# Altium PCB InverterPCBV2.PcbDoc
Units mil, origin at the board's own origin, x right, y up, seen from the top; angles counter-clockwise.
Board outline 3937.01 x 3937.01 mil, 2 copper layers (Top Layer, Bottom Layer); 72 components, 46 nets, 219 pads, 16 vias.
Unrouted connection lines stored in the file: 1.
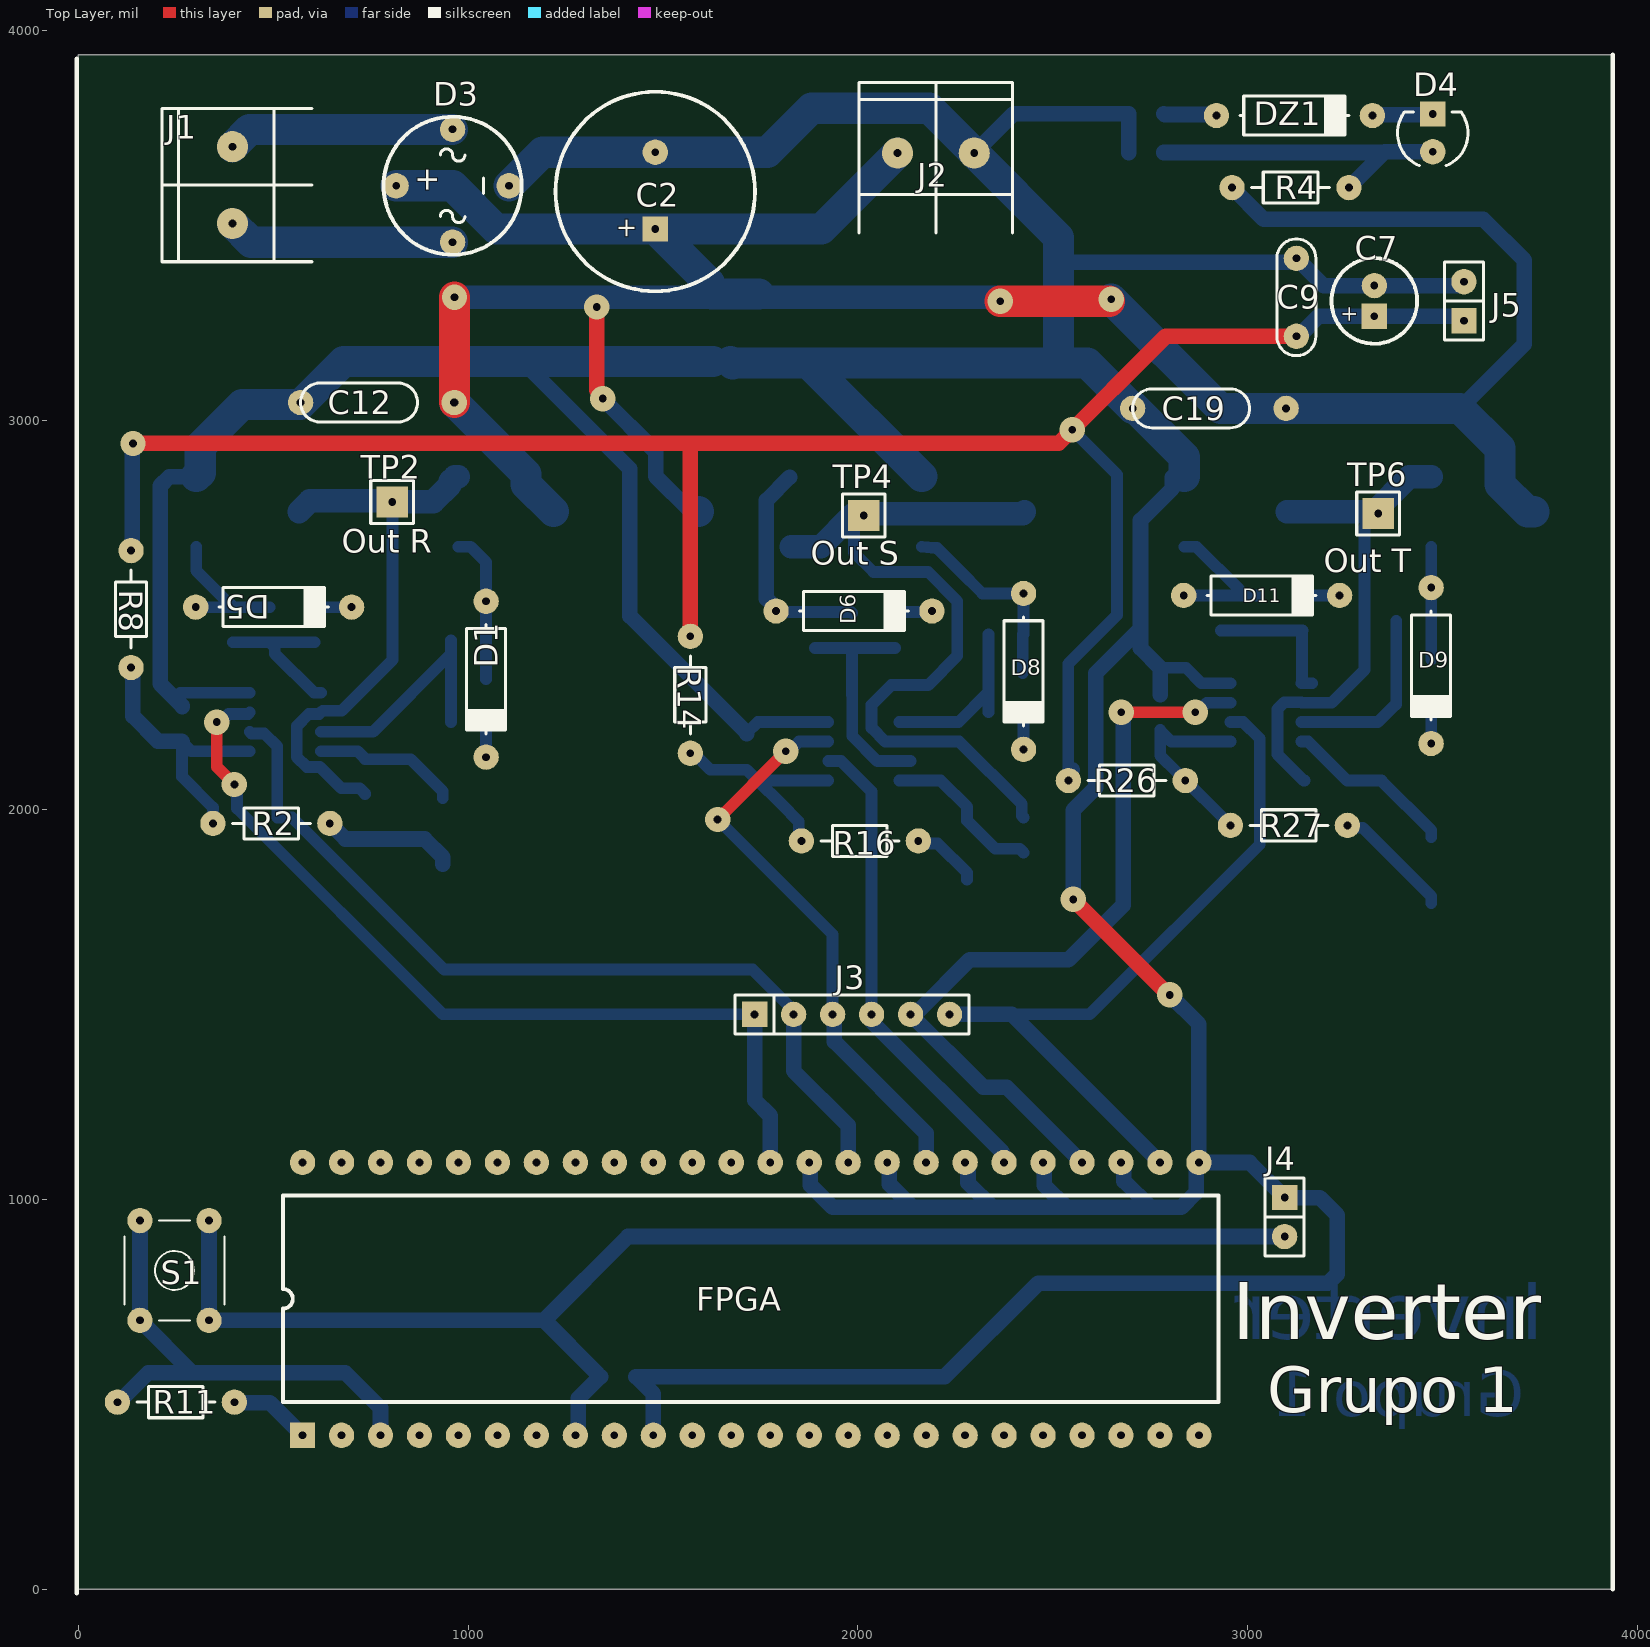
[diagram p0: Top Layer view]
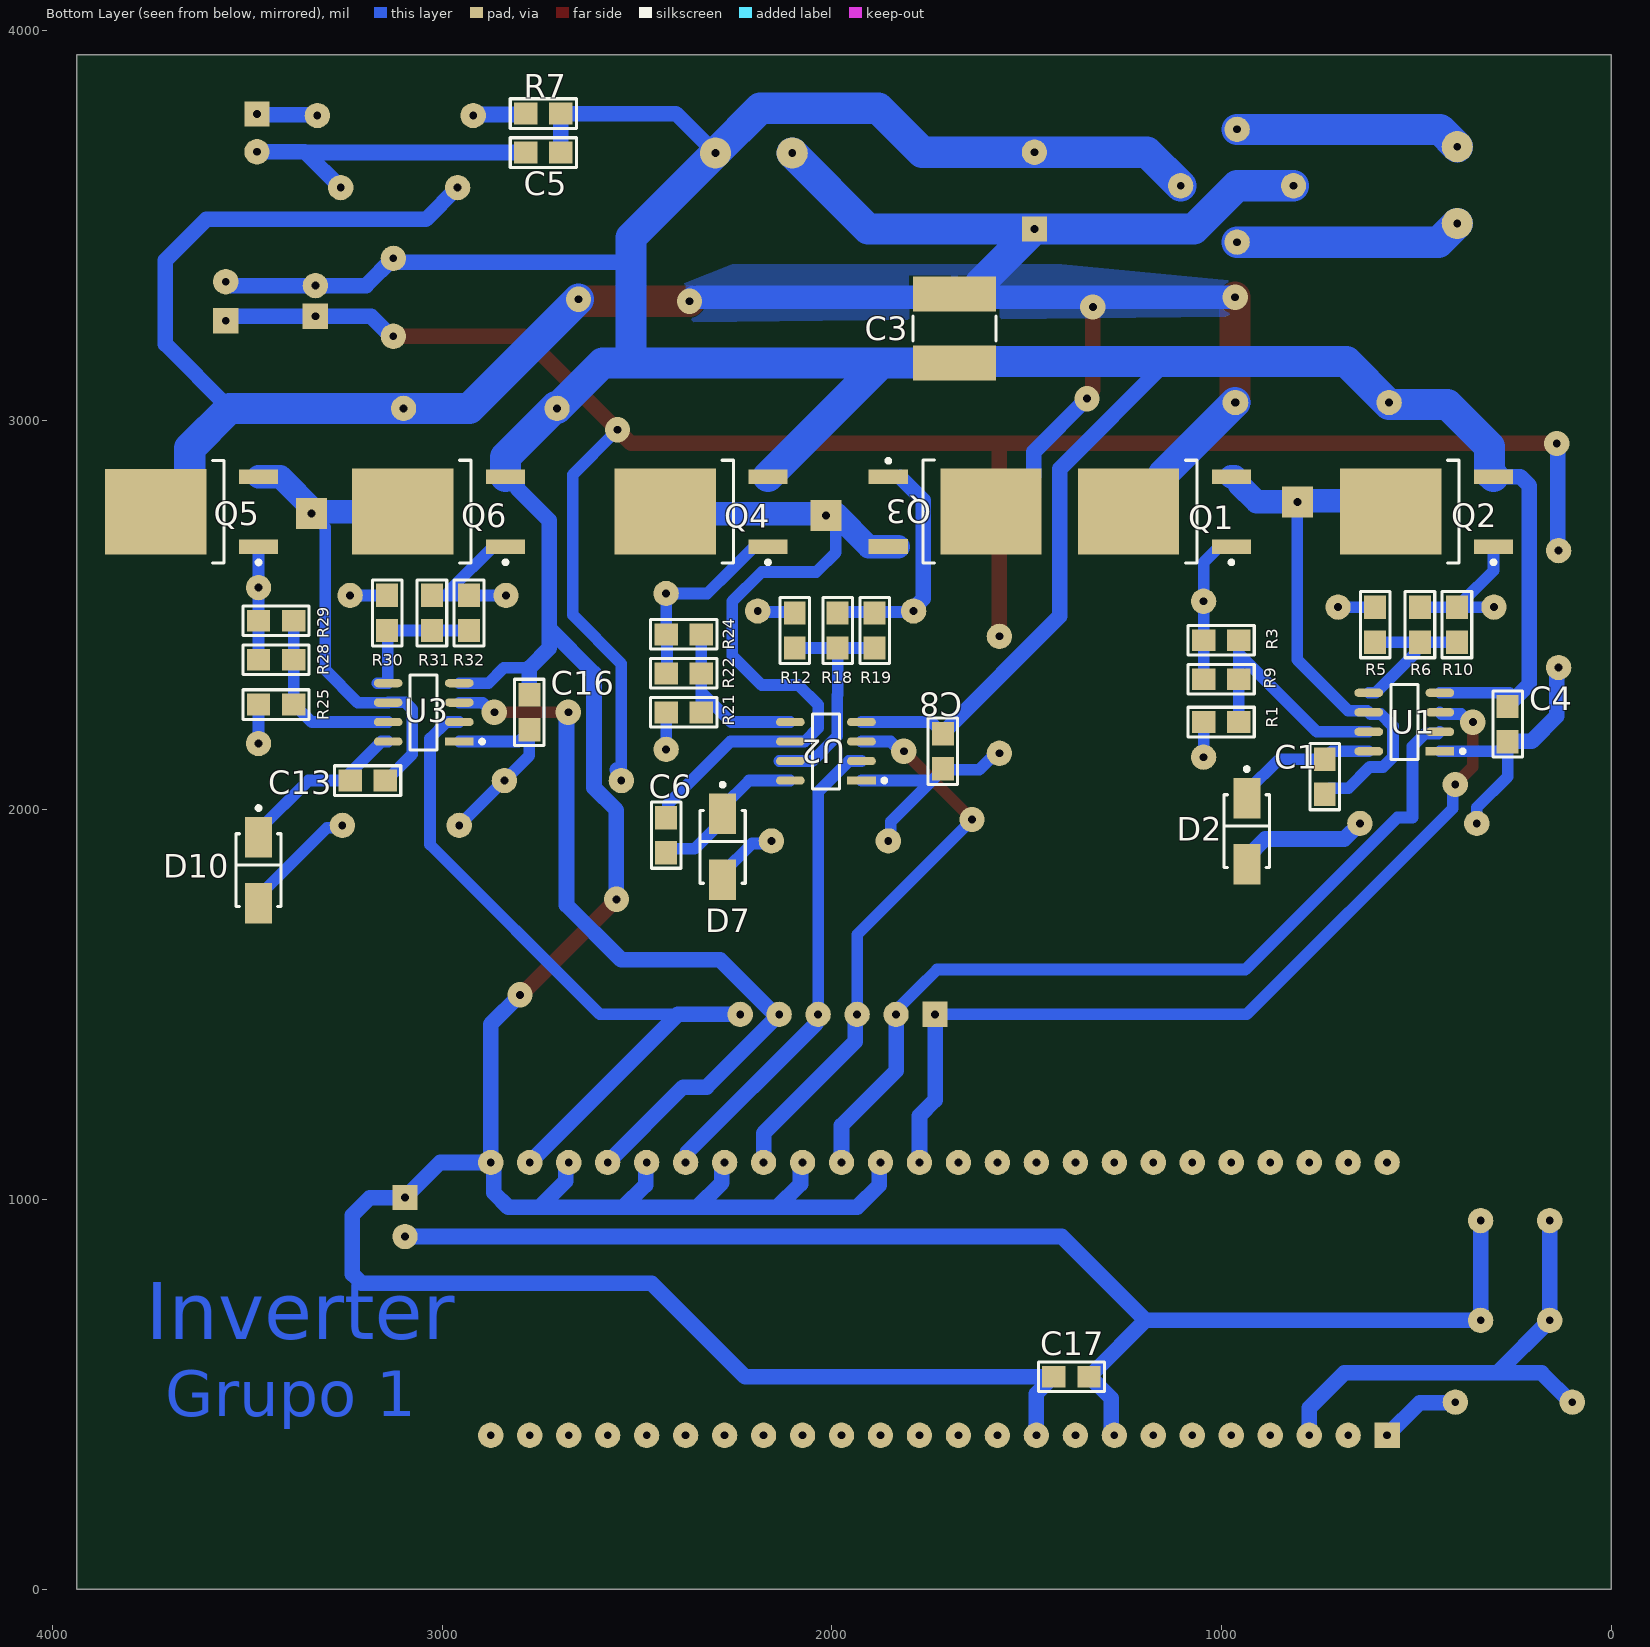
[diagram p1: Bottom Layer view, seen from below]

## Layer stack, top to bottom
Top Solder: solder mask 0.4, Solder Resist, Dk 3.5
Top Layer: signal copper 1.4
Dielectric 1: dielectric 12.6, FR-4, Dk 4.8
Bottom Layer: signal copper 1.4
Bottom Solder: solder mask 0.4, Solder Resist, Dk 3.5

## Board outline
0,0 3937.01,0 3937.01,3937.01 0,3937.01

## Design rules (kind name [scope] priority, off if disabled: settings)
Clearance [All] p1: gap=10 ignorepadtopadclearanceinfootprint=FALSE except(0: Arc-Hole Track-Hole SMDPad-Hole THPad-Hole Via-Hole Fill-Hole Poly-Hole Region-Hole Text-Hole; 15: Arc-Fill Arc-Poly Arc-Region Track-Fill Track-Poly Track-Region SMDPad-Fill SMDPad-Poly SMDPad-Region THPad-Fill THPad-Poly THPad-Region Via-Fill Via-Poly Via-Region)
PlaneClearance [All] p1: clearance=40
PolygonConnect [All] p1: connectstyle=Relief reliefconductorwidth=20 reliefentries=4 polygonreliefangle="90 Angle" airgapwidth=10
RoutingVias [All] p1: holewidth=20 width=65 viastyle="Through Hole" minholewidth=10 minwidth=50 maxholewidth=25 maxwidth=100
SilkToSilkClearance [All] p1: silktosilkclearance=0
SilkToSolderMaskClearance [IsPad] p1: minsilkscreentomaskgap=0 clearancetoexposedcopper=TRUE
SolderMaskExpansion [All] p1: expansion=4 istentingtop=FALSE
Width [All] p1: maxlimit=80 minlimit=30 preferedwidth=40 minimp=50.000000 maximp=50.000000 favimp=50.000000
27 further rules are at their usual default settings.

## Components (designator, comment, footprint, x,y, rotation, side; value= is the part's Value field where it differs from the comment)
C1 "1u" 0805 735,2085 r270 bottom
C2 "10u - 400V" CAP200RP2 1480,3586.4 r90 top
C3 "1uF - 500V" FP-GRM55D-0_4-IPC_B 1685,3235 r270 bottom
C4 "10u" 0805 265.91,2220 r90 bottom
C5 "100n" 0805 2740,3686.4 r0 bottom
C6 "1u" 0805 2425,1935 r90 bottom
C7 "10u - 25V" CAP100RP 3325,3305.63 r90 top
C8 "10u" 0805 1715,2150 r90 bottom
C9 "100n" CAP200#1 3125,3315 r90 top
C12 "100n - 400V" CAP200#2 720,3045 r180 top
C13 "1u" 0805 3190.91,2075 r180 bottom
C16 "10u" 0805 2775.91,2250 r90 bottom
C17 "470n" 0805 1385,545 r0 bottom
C19 "100n - 400V" CAP200#2 2855,3030 r180 top
D1 "1N4148" DO41 1045.91,2335 r270 top
D2 "ES1G" FP-403AE-MFG 935,1945 r270 bottom value=10pF
D3 "PUENTE" "PUENTE - W10M" 815.24,3601.16 r90 top
D4 "LED" LED3 3475,3736.4 r90 top
D5 "1N4148" DO41 500.91,2520 r0 top
D6 "1N4148" DO41 1990,2510 r0 top
D7 "ES1G" FP-403AE-MFG 2280,1905 r270 bottom value=10pF
D8 "1N4148" DO41 2425,2355 r270 top
D9 "1N4148" DO41 3470.91,2370 r270 top
D10 "ES1G" FP-403AE-MFG 3470.91,1845 r270 bottom value=10pF
D11 "1N4148" DO41 3035.91,2550 r0 top
DZ1 "13V" DO41 3120,3781.4 r0 top
FPGA "upduino" FPGA 575,395 r90 top
J1 "VAC" BORNERA2 395,3602.97 r0 top
J2 "AUX  310dc" BORNERA2 2200,3685 r270 top
J3 "CON6" SIP6 1735,1475 r0 top
J4 "Vin 5V" SIP2 3095,955 r270 top
J5 "Vin 5V" SIP2 3555,3305 r90 top
Q1 "IPD50R650CE" INF-PG-TO252-3-313_N 1145.91,2765 r0 bottom
Q2 "IPD50R650CE" INF-PG-TO252-3-313_N 473.39,2765 r0 bottom
Q3 "IPD50R650CE" INF-PG-TO252-3-313_N 1683.74,2765.24 r180 bottom
Q4 "IPD50R650CE" INF-PG-TO252-3-313_N 2335,2765 r0 bottom
Q5 "IPD50R650CE" INF-PG-TO252-3-313_N 3642.14,2764.76 r0 bottom
Q6 "IPD50R650CE" INF-PG-TO252-3-313_N 3008.36,2765 r0 bottom
R1 "33" 0805 1000.91,2225 r0 bottom
R2 "2.2" RES300 345,1965 r0 top
R3 "68" 0805 1000.91,2435 r0 bottom
R4 "100K - 2W" RES300 3260,3596.4 r180 top
R5 "33" 0805 605.91,2475 r90 bottom
R6 "68" 0805 490.91,2475 r90 bottom
R7 "1K" 0805 2740,3786.4 r180 bottom
R8 "10" RES300 135,2365 r90 top
R9 "68" 0805 1000.91,2335 r0 bottom
R10 "68" 0805 395.91,2475 r90 bottom
R11 "10K" RES300 100,480 r0 top
R12 "33" 0805 2095,2460 r90 bottom
R14 "10" RES300 1570,2145 r90 top
R16 "2.2" RES300 1855,1920 r0 top
R18 "68" 0805 1985,2460 r90 bottom
R19 "68" 0805 1890,2460 r90 bottom
R21 "33" 0805 2380,2250 r0 bottom
R22 "68" 0805 2380,2350 r0 bottom
R24 "68" 0805 2380,2450 r0 bottom
R25 "33" 0805 3425.91,2270 r0 bottom
R26 "10" RES300 2840,2075 r180 top
R27 "2.2" RES300 2955.91,1960 r0 top
R28 "68" 0805 3425.91,2385 r0 bottom
R29 "68" 0805 3425.91,2485 r0 bottom
R30 "33" 0805 3140.91,2505 r90 bottom
R31 "68" 0805 3025.91,2505 r90 bottom
R32 "68" 0805 2930.91,2505 r90 bottom
S1 "TACT SWITCH" TACTSWITCH 246.42,817.95 r180 top
TP2 "Out R" TPTH 805,2790 r90 top
TP4 "Out S" TPTH 2015,2755 r0 top
TP6 "Out T" TPTH 3335,2760 r90 top
U1 "UCC27710" FP-PG-DSO-8-IPC_C 530.91,2225 r0 bottom
U2 "UCC27710" FP-PG-DSO-8-IPC_C 2015,2150 r0 bottom
U3 "UCC27710" FP-PG-DSO-8-IPC_C 3047.09,2250 r0 bottom

## Footprints (in the part's own frame and the unit in brackets; to place one, negate y for a bottom-side part, rotate by r counter-clockwise, add the part's x,y. Pads: shape width x height; smd on the part's side, far side on the other; paste and mask are expansions set on the pad)
0805 [mil] "Pasivo 0805"
  rect 60x56 smd: 1(-45,0) 2(45,0)
  silkscreen extent -85,-38 85,38, body extent -40,-25 39,25, height 15
BORNERA2 [mil] "Bornera con Tornillos 5mm separación"
  round 80 hole 20: 1(0,98.43) 2(0,-98.43)
  silkscreen extent -181,-197 205,197, body extent -148,-193 155,221, height 394
CAP100RP [mil] "Body diameter 5mm"
  rect 65x65 hole 20: 1(-39.37,0)
  round 65 hole 20: 2(39.37,0)
  silkscreen extent -110,-110 110,110, body extent -99,-99 99,100, height 454
CAP200#1 [mil]
  round 65 hole 20: 1(-100,0) 2(100,0)
  silkscreen extent -150,-50 150,50, body extent -110,-46 110,44, height 246
CAP200#2 [mil]
  round 65 hole 20: 1(-243.7,0) 2(150,0)
  silkscreen extent -150,-50 150,50, body extent -110,-46 110,44, height 246
CAP200RP2 [mil] "Body Diameter 12.5mm"
  rect 65x65 hole 20: 1(-96.06,0)
  round 65 hole 20: 2(100.79,0)
  silkscreen extent -256,-256 256,256, body extent -246,-245 244,246, height 787
DO41 [mil]
  round 65 hole 20: 1(-200,0) 2(200,0)
  silkscreen extent -140,-50 140,50, body extent -215,-47 215,54, height 80
FP-403AE-MFG [mm]
  rect 2.65x1.75 smd paste+0 mask+0: 1(-2.15,0) 2(2.15,0)
  silkscreen extent -4.17,-1.48 2.37,1.48, body extent -2.6,-1.36 2.6,1.36, height 2.5
FP-GRM55D-0_4-IPC_B [mil]
  rect 90.64x212.72 smd paste+0 mask+0: 1(-88.6,0) 2(88.6,0)
  silkscreen extent -31,-106 31,106, body extent -112,-98 112,98, height 79
FP-PG-DSO-8-IPC_C [mil]
  rect 73.78x21.34 smd paste+0 mask+0: 1(-91.18,75)
  rrect100% 73.78x21.34 smd paste+0 mask+0: 2(-91.18,25) 3(-91.18,-25) 4(-91.18,-75) 5(91.18,-75) 6(91.18,-25) 7(91.18,25) 8(91.18,75)
  silkscreen extent -155,-96 35,96, body extent -118,-96 118,96, height 69
FPGA [mil]
  rect 65x65 hole 20: 1(0,0)
  round 65 hole 20: 2(0,-100) 3(0,-200) 4(0,-300) 5(0,-400) 6(0,-500) 7(0,-600) 8(0,-700) 9(0,-800) 10(0,-900) 11(0,-1000) 12(0,-1100) 13(0,-1200) 14(0,-1300) 15(0,-1400) 16(0,-1500) 17(0,-1600) 18(0,-1700) 19(0,-1800) 20(0,-1900) 21(0,-2000) 22(0,-2100) 23(0,-2200) 24(0,-2300) 25(700,-2300) 26(700,-2200) 27(700,-2100) 28(700,-2000) 29(700,-1900) 30(700,-1800) 31(700,-1700) 32(700,-1600) 33(700,-1500) 34(700,-1400) 35(700,-1300) 36(700,-1200) 37(700,-1100) 38(700,-1000) 39(700,-900) 40(700,-800) 41(700,-700) 42(700,-600) 43(700,-500) 44(700,-400) 45(700,-300) 46(700,-200) 47(700,-100) 48(700,0)
  silkscreen extent 85,-2350 615,50
INF-PG-TO252-3-313_N [mm] "DPAK, 3-Leads, Body 6.5x6.12mm, Pitch 2.28mm, IPC Medium Density"
  rect 2.55x0.95 smd: 1(-4.35,2.28) 3(-4.35,-2.28)
  rect 6.6x5.6 smd: 2(2.35,0)
  silkscreen extent -4.47,-3.35 -1.35,3.43, body extent -2.1,-3.32 4.12,3.32, height 2.35
LED3 [mil]
  round 65 hole 20: 1(-48,0)
  rect 65x65 hole 20: 2(49,0)
  silkscreen extent -84,-90 54,90, body extent -65,-64 65,65, height 19
"PUENTE - W10M" [mil]
  round 65 hole 20: 1(0,0) 2(-144.76,-144.76) 3(0,-289.52) 4(144.76,-144.76)
  silkscreen extent -177,-322 177,32
RES300 [mil]
  round 65 hole 20: 1(0,0) 2(300,0)
  silkscreen extent 50,-40 250,40, body extent -10,-38 310,38, height 79
SIP2 [mil]
  rect 65x65 hole 20: 1(-50,0)
  round 65 hole 20: 2(50,0)
  silkscreen extent -100,-50 100,50
SIP6 [mil]
  rect 65x65 hole 20: 1(0,0)
  round 65 hole 20: 2(100,0) 3(200,0) 4(300,0) 5(400,0) 6(500,0)
  silkscreen extent -50,-50 550,50, body extent -50,-51 550,49, height 330
TACTSWITCH [mil]
  round 65 hole 20: 1(-88.58,-127.95) 2(-88.58,127.95) 3(88.58,-127.95) 4(88.58,127.95)
  silkscreen extent -128,-128 128,128, body extent -120,-156 124,156, height 276
TPTH [mil]
  rect 80x80 hole 20: 1(0,0)
  silkscreen extent -55,-55 55,55, body extent -50,-50 50,50, height 238

## Part data
C1 C4 C5 C6 C8 C9 C12 C13 C16 C17 C19: library part CAP
C2 C7: library part CAPPOL
C3: library part CMP-2000-06370-2, "Chip Multilayer Ceramic Capacitors for General Purpose, 2220, 1.0uF, X7R, 15%, 10%, 500V", Capacitance=1uF, Case Code (Imperial)=2220, Case Code (Metric)=5750, Dielectric=X7R, Max Operating Temperature=125°C, Min Operating Temperature=-55°C, Package Quantity=1, Tolerance=10%, Voltage=250V, Case/Package=2220, Depth=5mm, Height=2mm, Lead Free="Lead Free", Length=5.7mm, Material=Ceramic, Mount="Surface Mount", Number of Pins=2, Packaging="Tape and Reel", REACH SVHC="No SVHC", Termination=SMD/SMT, Thickness=0.087inch, Voltage Rating=250V, Voltage Rating (DC)=250V, Width=5mm
D1 D5 D6 D8 D9 D11: library part DIODO
D2 D7 D10: library part CMP-07163-000025-1, "DIODE GEN PURP 400V 1A SMA", Capacitance=10pF, Forward Current=1A, Manufacturer="ON Semiconductor", Max Junction Temp=+150°C, Max Repetitive Reverse Voltage=400V, Max Surge Forward Current=30A, Package=403AE, Peak Reverse Current=5uA, Temperature="to +150°C", Automotive=No, Category=Diode, ComponentLink2Description=Datasheet, ComponentLink2URL=https://www.onsemi.com/pub/Collateral/ES1J-D.PDF, Device Class L1="Discrete Semiconductors", Device Class L2=Diodes, Device Class L3="Rectifier Diodes", Digikey Description="DIODE GEN PURP 400V 1A SMA", Footprint Url=https://www.onsemi.com/pub/Collateral/403AE.PDF, Height=2.5mm, Lead Free=Yes, Manufacturer Part Number=ES1G, Mouser Description="Rectifiers 1.0 A Ultra Fast Recovery Rect", Octopart=https://octopart.com/es1g-on+semiconductor-84324858, RoHS=TRUE, Standoff Height=0.05mm, Temperature Range High=+150°C
DZ1: library part "DIODO ZENER"
FPGA: library part FPGA, "upduino v3.0"
J1 J2: library part "BORNERA 2"
J4 J5: library part CON2, "UPDuino Power Input"
Q1 Q2 Q3 Q4 Q5 Q6: library part CMP-1164-00335-1, "N-Channel CoolMOS CE Power-Transistor, 500 V VDS, 6.1 A ID, -55 to 150 degC, PG-TO252-3-313, Reel, Green", Manufacturer=Infineon, ComponentLink1Description="Manufacturer URL", ComponentLink1URL=http://www.infineon.com/, ComponentLink2Description=Datasheet, ComponentLink2URL=http://www.infineon.com/dgdl/IPD50R650CE+2.0.pdf?folderId=db3a3043156fd5730115c736bcc70ff2&fileId=db3a304339d29c450139d41341a202a1, ComponentLink3Description="Package Specification", ComponentLink3URL=http://www.infineon.com/dgdl/PG-TO252-3-313-Package_Overview.pdf?folderId=db3a30432b57a660012b81890ade72d2&fileId=db3a30432b57a660012b8193af2872eb, DatasheetVersion="Rev. 2.0", Green=TRUE, ID (max)="6.1Â A", IDpuls (max)="19Â A", Mounting Technology="Surface Mount", PackageDescription="3-Pin Plastic (Green) Transistor Single Outline Package, 6.5 x 6.12 mm Body, 2.28 mm Pitch", PackageReference=PG-TO252-3-313, PackageVersion=Oct-10, Packing=Reel, PartNumber=IPD50R650CE, Polarity=N, Ptot (max)="47Â W", QG="15Â nC", RDS (on) (max)="650Â mOhm", Rth="2.67Â K/W", RthJA (max)="62Â K/W", RthJC (max)="2.67Â K/W", Technology="CoolMOS CE", VDS (max)="500Â V", VGS(th) (max)="3.5Â V", VGS(th) (min)="2.5Â V"
R1 R12 R25: library part RES, "33?"
R2 R3 R4 R5 R6 R7 R8 R9 R10 R11 R14 R16 R18 R19 R21 R22 R24 R26 R27 R28 R29 R30 R31 R32: library part RES
TP2 TP4 TP6: library part TP
U1 U2 U3: library part CMP-32851-000209-1, "GATE DRVR HI/LOW SIDE 8SOIC", Case/Package=SOIC, Max Operating Temperature=150°C, Max Output Current=600mA, Max Supply Voltage=20V, Min Operating Temperature=-40°C, Min Supply Voltage=10V, Output Voltage=620V, Package Quantity=95, Channel Type=Independent, Fall Time=90ns, Halogen Free="Halogen Free", Height=0.059inch, Lead Free="Lead Free", Length=0.196inch, Mount="Surface Mount", Number of Channels=2, Number of Drivers=2, Number of Outputs=2, Number of Pins=8, Output Current=600mA, Packaging=Rail/Tube, Propagation Delay=160ns, Reach SVHC Compliant=Yes, RoHS Compliant=Yes, Series=-, Width=0.157inch

## Via types
v1: diameter 65, hole 20, Top Layer to Bottom Layer, 16 vias

## Nets (pads, with @x,y where several pads share a name; then routed paths per layer and width w, separated by ;. In a path a pad name is that pad's centre, name@x,y a point inside that pad or via, vN(x,y) a via of type N, cw(c..) or ccw(c..) an arc to the next point about the centre after c; other vN are vias at no path point)
5V: C17.1 FPGA.8 J4.2 S1.1 S1.2 | length 3487.3
  Bottom Layer w40: S1.1 S1.2 1195,690 ; FPGA.8 1282.41,402.41 1282.41,489.41 C17.1@1338,545 ; C17.1 C17.1@1338,545 ; J4.2 1410,905 1195,690 ; 1195,690 1330,555 1330,553 C17.1@1338,545
GND: C2.2 C3.2 C4.2 C5.1 C7.2 C8.2 C9.2 C12.2 C16.2 C17.2 C19.2 D3.3 FPGA.1 FPGA.10 FPGA.25 FPGA.27 FPGA.29 FPGA.31 FPGA.33 FPGA.35 J2.1 J4.1 J5.2 Q2.3 Q4.3 Q6.3 R7.2 R11.2 U1.4 U2.4 U3.4 | length 16087.3
  Top Layer w40: v1(2552.5,1770) 2797.5,1525 v1(2800,1525)
  Bottom Layer w30: 260.91,2300 U1.4 ; C8.2@1715,2197 1743,2225 U2.4 ; 2775.91,2364.09 2841.81,2364.09 2880.91,2325 U3.4
  Bottom Layer w40: C4.2 265.91,2267 210,2322.91 210,2831.33 233.43,2854.76 Q2.3 ; R11.2 401,479 491,479 FPGA.1 ; 1139.45,3150 1415,2874.45 1415,2497 1715,2197 C8.2 ; C17.2 C17.2@1432,545 ; FPGA.10 1475,502 C17.2@1432,545 ; C3.2@1627.56,3150 C3.2@1672.8,3150 ; FPGA.35 1877.77,1092.23 1877.77,1037.23 1935,980 2140,980 ; FPGA.33 2080.27,1089.73 2080.27,1039.73 2140,980 ; FPGA.31 2282.41,1087.59 2282.41,1042.59 2345,980 ; J2.1 2399.82,3786.4 R7.2 ; FPGA.29 2477.77,1092.23 2477.77,1037.23 2535,980 ; 2515,3405 C9.2@3125,3405 ; v1(2552.5,1770) 2552.5,1999.11 2610,2056.61 2610,2349.93 2725,2464.93 ; FPGA.27 2682.41,1087.59 2682.41,1047.59 2750,980 ; C5.1 R7.2@2695,3781.4 ; C16.2 2775.91,2364.09 2725,2415 2725,2464.93 ; v1(2800,1525) 2875,1450 FPGA.25@2875,1112.9 ; Q6.3 2808.2,2854.76 2806.9,2853.46 2806.9,2824.57 2725,2742.66 2725,2464.93 ; C9.2 3195,3345 C7.2 3539.84,3345 3549.84,3355 J5.2 ; C17.2@1432,545 2222.5,545 2462.5,785 3206.57,785 3230,808.43 3230,960 3185,1005 J4.1 3005,1095 FPGA.25 2867.59,1087.59 2867.59,1017.59 2830,980 2750,980 ; 2140,980 2345,980 ; 2345,980 2535,980 ; 2535,980 2750,980
  Bottom Layer w80: Q2.3 312.32,2864.96 312.32,2932.32 420,3040 570,3040 680,3150 1139.45,3150 C3.2@1627.56,3150 ; D3.3 1190.79,3687.19 C2.2 1767.72,3687.19 1880.53,3800 2183.43,3800 J2.1 2515,3468.43 2515,3405 2515,3146.4 ; C3.2@1672.8,3150 C3.2@1678.97,3143.83 ; C3.2 1872.1,3146.4 ; Q4.3 1872.1,3146.4 ; C19.2 2588.6,3146.4 2515,3146.4 ; C19.2@2707.34,3035 2837.1,2905.24 Q6.3 ; 1872.1,3146.4 2515,3146.4
HI-1: FPGA.34 J3.2 U1.2 | length 2246.4
  Bottom Layer w30: U1.2 444.05,2195.67 476.97,2195.67 510,2162.64 510,1980 548.68,1980 938.68,1590 1730,1590 1779.15,1540.85 1817.5,1502.5 1817.5,1501.97 1835,1484.47 J3.2
  Bottom Layer w40: J3.2 1835,1330 1975,1190 FPGA.34
HI-2: FPGA.30 J3.4 U2.2 | length 1236.2
  Bottom Layer w30: U2.2 1956.73,2125 2035,2046.73 J3.4
  Bottom Layer w40: J3.4 2039.78,1470.22 2039.78,1451.97 2370.22,1121.54 2370.22,1099.78 FPGA.30
HI-3: FPGA.26 J3.6 U3.2 | length 1878.3
  Bottom Layer w30: 2395,1475 2595,1475 3030.91,1910.91 3030.91,2182.92 2988.82,2225 U3.2
  Bottom Layer w40: J3.6 2395,1475 FPGA.26
LI-1: FPGA.36 J3.1 U1.3 | length 2281.9
  Top Layer w30: v1(355,2225) 355,2110 v1(400,2065)
  Bottom Layer w30: v1(355,2225) 364.47,2225 385.14,2245.67 435.39,2245.67 U1.3 ; v1(400,2065) 406.7,2058.3 406.7,2003.3 935,1475 J3.1
  Bottom Layer w40: J3.1 1735,1255 1775,1215 FPGA.36
LI-2: FPGA.32 J3.3 U2.3 | length 1468.3
  Top Layer w30: v1(1640,1975) v1(1815,2150)
  Bottom Layer w30: v1(1640,1975) 1935,1680 J3.3 ; v1(1815,2150) 1823.74,2150 1848.74,2175 U2.3
  Bottom Layer w40: J3.3 1939.78,1470.22 1939.78,1405.22 2175,1170 FPGA.32
LI-3: FPGA.28 J3.5 U3.3 | length 2016.7
  Top Layer w30: v1(2675.91,2250) v1(2865.64,2250)
  Bottom Layer w30: v1(2865.64,2250) 2870.38,2250 2895.38,2275 U3.3
  Bottom Layer w40: J3.5 2321.54,1288.46 2381.54,1288.46 FPGA.28 ; J3.5@2159.11,1487.5 2286.61,1615 2540,1615 2680.69,1755.69 2680.69,2245.22 v1(2675.91,2250)
NetC1_1: C1.1 D2.1 U1.8 | length 374.3
  Bottom Layer w30: U1.8 717,2150 735,2132 C1.1 852.36,2130 935,2047.36 D2.1
NetC1_2: C1.2 Q1.3 Q2.2 TP2.1 U1.6 | length 1464.9
  Bottom Layer w30: C1.2 735,2042 722,2055 674.21,2055 619.21,2110 585.42,2110 560.2,2135.22 560.2,2214.78 591.09,2245.67 617.76,2245.67 U1.6 626.42,2254.33 675.23,2254.33 805.91,2385 TP2.1@805.91,2790
  Bottom Layer w60: Q2.2 593.41,2792.5 TP2.1@802.5,2792.5 ; TP2.1@805.91,2790 909.88,2790 954.45,2834.57 954.45,2843.46 965.75,2854.76 Q1.3
NetC4_1: C4.1 R2.1 R8.1 U1.1 | length 704
  Bottom Layer w30: R2.1 345,2005.91 265.91,2085 265.91,2173 288.91,2150 U1.1
  Bottom Layer w40: R8.1 139.78,2360.22 139.78,2240.22 204.03,2175.97 264.93,2175.97 C4.1
NetC5_2: C5.2 D4.1 R4.1 | length 818.1
  Bottom Layer w40: C5.2 3350,3686.4 ; R4.1 3350,3686.4 ; D4.1 3352,3688.4 3350,3686.4
NetC6_1: C6.1 D7.1 U2.8 | length 416.2
  Bottom Layer w30: U2.8 2212.36,2075 2280,2007.36 D7.1 2280,1971.93 2352,1899.93 2415.07,1899.93 C6.1
NetC6_2: C6.2 Q3.3 Q4.2 TP4.1 U2.6 | length 2018.3
  Bottom Layer w30: TP4.1@1990,2755 1990,2660 2040,2610 2180,2610 2255,2535 2255,2395 2180,2320 2085.48,2320 2035,2269.52 2035,2210 2070,2175 U2.6 2260,2175 2420,2015 2420,1985 C6.2
  Bottom Layer w60: Q3.3@1829.09,2675 1905,2675 TP4.1@1987.5,2757.5 ; TP4.1@1990,2760 2422.52,2760 Q4.2
NetC7_1: C7.1 C9.1 J5.1 R8.2 R14.2 R26.2 | length 5335.4
  Top Layer w40: v1(140,2940) 1575,2940 ; R14.2 1570,2935 1575,2940 ; C9.1 2790,3215 2515,2940 1575,2940
  Bottom Layer w30: R26.2 2540,2375 2665,2500 2665,2860 v1@2555,2970
  Bottom Layer w40: R8.2 137.5,2667.5 137.5,2937.5 v1(140,2940) ; R26.2 R26.2@2544.78,2079.78 ; R26.2@2544.78,2097.46 R26.2@2550,2102.68 ; C9.1 3130.95,3215 3182.21,3266.26 C7.1 3543.74,3266.26 J5.1
  other v1: 2550,2975
NetC8_1: C8.1 R14.1 R16.1 U2.1 | length 584.2
  Bottom Layer w30: R14.1 1579.47,2145 1621.47,2103 1715,2103 1743,2075 ; R16.1 1848.3,1926.7 1848.3,1969.7 1803,2015 1743,2075 ; U2.1 1743,2075
NetC13_1: C13.1 D10.1 U3.8 | length 444.6
  Bottom Layer w30: U3.8 3155.84,2175 3255.84,2075 3343.27,2075 3470.91,1947.36 D10.1
NetC13_2: C13.2 Q5.3 Q6.2 TP6.1 U3.6 | length 1321.3
  Bottom Layer w30: Q6.2 Q6.2@3120.56,2765 ; C13.2 3143.91,2075 3076.38,2142.52 3076.38,2257.96 3093.95,2275.54 3137.74,2275.54 U3.6 3215.91,2275 3300,2359.09 3300,2725 TP6.1
  Bottom Layer w60: Q6.2@3100.95,2765.07 3325.07,2765.07 3415,2855 3470.41,2855 Q5.3
NetC16_1: C16.1 R26.1 R27.1 U3.1 | length 511.7
  Bottom Layer w30: C16.1@2775.91,2203 2803.91,2175 U3.1 ; C16.1 2775.91,2139.09 2820,2095 2820.91,2095 R27.1
NetD1_1: D1.1 Q1.1 R3.2 R9.2 | length 388.2
  Bottom Layer w30: Q1.1 1006.14,2675.24 1045.91,2635.47 D1.1 R3.2 R9.2
NetD1_2: D1.2 R1.2 | length 90
  Bottom Layer w30: D1.2 R1.2
NetD2_2: D2.2 R2.2 | length 343.7
  Bottom Layer w40: R2.2 685,1925 888.07,1925 935,1878.07 D2.2
NetD3_2: D3.2 J1.2 | length 584.9
  Bottom Layer w80: J1.2 443.15,3456.4 D3.2
NetD3_4: D3.4 J1.1 | length 584.8
  Bottom Layer w60: J1.1 J1.1@396.35,3701.4
  Bottom Layer w80: J1.1 439.52,3745.92 D3.4
NetD4_2: D4.2 DZ1.2 | length 156.7
  Bottom Layer w40: DZ1.2 3322,3783.4 3473,3783.4 D4.2
NetD5_1: D5.1 Q2.1 R6.2 R10.2 | length 385.3
  Bottom Layer w30: D5.1 R10.2 ; Q2.1 302.13,2613.78 380.91,2535 382.91,2535 395.91,2522 R10.2 ; R6.2 R10.2
NetD5_2: D5.2 R5.2 | length 95
  Bottom Layer w30: R5.2 D5.2
NetD6_1: D6.1 Q3.1 R18.2 R19.2 | length 575.9
  Bottom Layer w30: D6.1 1792.5,2507.5 1890,2507.5 1982.5,2507.5 R18.2
  Bottom Layer w40: D6.1 1790,2516.76 1765,2541.76 1765,2793.9 Q3.1@1824.8,2853.7
NetD6_2: D6.2 R12.2 | length 97.1
  Bottom Layer w30: R12.2 2097.5,2507.5 2187.5,2507.5 D6.2
NetD7_2: D7.2 R16.2 | length 176.7
  Bottom Layer w30: R16.2 2161.7,1913.3 2204.77,1913.3 2280,1838.07 D7.2
NetD8_1: D8.1 Q4.1 R22.2 R24.2 | length 514.7
  Bottom Layer w30: Q4.1 2198.94,2671.54 2203.15,2671.54 2258.47,2616.22 2319.68,2555 D8.1 R24.2 ; R22.2@2423,2350 R24.2@2423,2450
NetD8_2: D8.2 R21.2 | length 95
  Bottom Layer w30: D8.2 R21.2
NetD9_1: D9.1 Q5.1 R28.2 R29.2 | length 290
  Bottom Layer w30: R28.2 R29.2 D9.1 Q5.1
NetD9_2: D9.2 R25.2 | length 100
  Bottom Layer w30: D9.2 R25.2
NetD10_2: D10.2 R27.2 | length 308.1
  Bottom Layer w30: R27.2 3262.03,1953.88 3295.1,1953.88 3470.91,1778.07 D10.2
NetD11_1: D11.1 Q6.1 R31.2 R32.2 | length 392.2
  Bottom Layer w30: D11.1 R32.2 2978.41,2550 ; Q6.1 2868.6,2675.24 2978.41,2565.43 2978.41,2550 ; R31.2 2978.41,2550
NetD11_2: D11.2 R30.2 | length 95
  Bottom Layer w30: R30.2 D11.2
NetDZ1_1: DZ1.1 R7.1 | length 143.8
  Bottom Layer w40: R7.1 2787.5,3783.9 2917.5,3783.9 DZ1.1 DZ1.1@2915.22,3776.62
NetFPGA_3: FPGA.3 R11.1 S1.3 S1.4 | length 1260.2
  Bottom Layer w40: R11.1 103.69,480 178.69,555 292.83,555 ; S1.3 S1.4 292.83,555 ; FPGA.3 775,465 685,555 292.83,555
NetR1_1: R1.1 R3.1 R9.1 U1.7 | length 626.7
  Bottom Layer w30: U1.7 755.91,2200 955.91,2400 ; R1.1 R9.1 955.91,2400 ; R3.1 955.91,2400
NetR5_1: R5.1 R6.1 R10.1 U1.5 | length 404.6
  Bottom Layer w30: R10.1 R6.1 ; R5.1 R6.1 ; U1.5 604.53,2300 503.91,2400.62 503.91,2417 R6.1
NetR12_1: R12.1 R18.1 R19.1 U2.7 | length 606.9
  Bottom Layer w30: R19.1 R18.1 ; R12.1 R18.1 ; U2.7@2135,2125 U2.7 2050,2125 1985.71,2189.29 1985.71,2294.29 1985,2295 R18.1
NetR21_1: R21.1 R22.1 R24.1 U2.5 | length 457.9
  Bottom Layer w30: U2.5 2258,2225 2333,2300 ; R21.1 R22.1 R24.1
NetR25_1: R25.1 R28.1 R29.1 U3.7 | length 476.3
  Bottom Layer w30: U3.7 3333.91,2225 3378.91,2270 R25.1 R28.1 R29.1
NetR30_1: R30.1 R31.1 R32.1 U3.5 | length 373.7
  Bottom Layer w30: R32.1 R31.1 R30.1 3139.59,2458.68 3139.59,2326.32 U3.5 U3.5@3165.91,2325
V300: C2.1 C3.1 C12.1 C19.1 D3.1 J2.2 Q1.2 Q3.2 Q5.2 R4.2 | length 7263.5
  Top Layer w40: v1(1330,3290) 1330,3076.76 1345,3061.76 v1(1345,3055)
  Top Layer w80: v1(965,3045) v1(965,3315) ; v1(2365,3305) v1@2645,3305
  Bottom Layer w40: v1(1345,3055) 1481.3,2918.7 1481.3,2855.47 1571.54,2765.24 Q3.2 ; R4.2 3041.4,3515 3605,3515 3710,3410 3710,3195 3545,3030
  Bottom Layer w60: v1(965,3315) C3.1@1623.96,3315 ; C3.1@1746.04,3315 2353.65,3315 2363.65,3305 v1(2365,3305)
  Bottom Layer w80: D3.1 960.24,3601.16 1071.06,3490.34 C2.1 ; v1(965,3045) 1148.5,2861.5 1148.5,2835.24 1218.74,2765 Q1.2@1218.86,2765.12 ; Q3.2@1591.1,2765.12 Q3.2 ; C3.1@1746.04,3323.6 C3.1 1623.96,3323.6 1618.64,3328.92 1618.64,3351.7 C2.1 ; J2.2 1906.91,3490.34 C2.1 ; v1(2650,3310) 2930,3030 C19.1 3545,3030 3647.52,2927.48 3647.52,2835 3717.75,2764.76 Q5.2
pads on no net: FPGA.2 FPGA.4 FPGA.5 FPGA.6 FPGA.7 FPGA.9 FPGA.11 FPGA.12 FPGA.13 FPGA.14 FPGA.15 FPGA.16 FPGA.17 FPGA.18 FPGA.19 FPGA.20 FPGA.21 FPGA.22 FPGA.23 FPGA.24 FPGA.37 FPGA.38 FPGA.39 FPGA.40 FPGA.41 FPGA.42 FPGA.43 FPGA.44 FPGA.45 FPGA.46 FPGA.47 FPGA.48

## Polygon pours and split planes (outlines as drawn)
V300 on Bottom Layer "V300_L02_P000" (solid, pour order 0): 925,3294.25 990,3265 2353.75,3251.25 2400,3297.5 2400,3341.94 2255,3400 1410,3400 925,3353.45

## Other copper
Bottom Layer:
  text "Inverter" at 3760,592.55 h250
  text "Grupo 1" at 3710,405.54 h200

## Silkscreen, mask and mechanical layers (free items; w line width, h text height)
Top Overlay:
  lines w11.81: -4.09,-10 -4.09,3927.01 ; 3937.01,0 3937.01,3937.01
  text "Inverter" at 2960,592.55 h250
  text "Grupo 1" at 3050,415.54 h200

## Text inside footprints (layer, text, board x,y; h text height)
C2: Top Overlay "+" at 1428,3464.4 h50 r90
C7: Top Overlay "+" at 3279,3248.63 h40 r90
D3: Top Overlay "+" at 920.63,3581.48 h60 r90